# Altium PCB PCB_ECEN403.PcbDoc
Units mil, origin at the board's own origin, x right, y up, seen from the top; angles counter-clockwise.
Board outline 6000 x 4000 mil, 2 copper layers (Top Layer, Bottom Layer); 15 components, 14 nets, 113 pads, 17 vias.
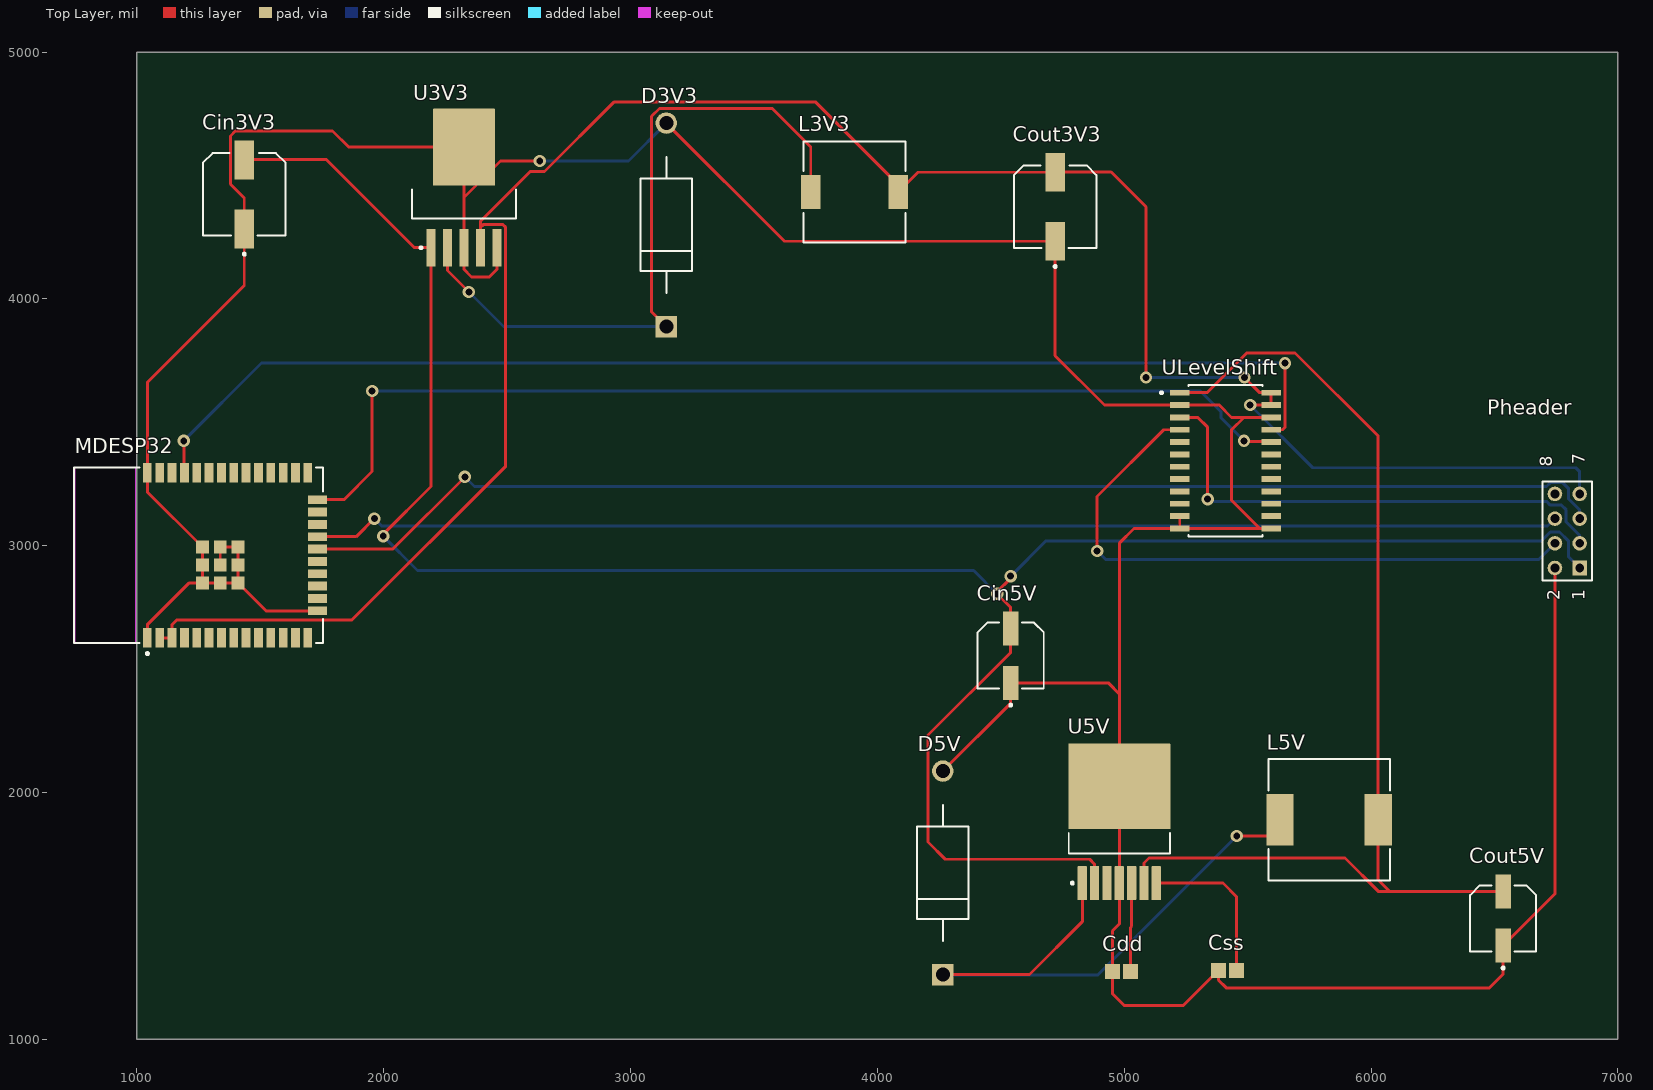
[diagram p0: Top Layer view]
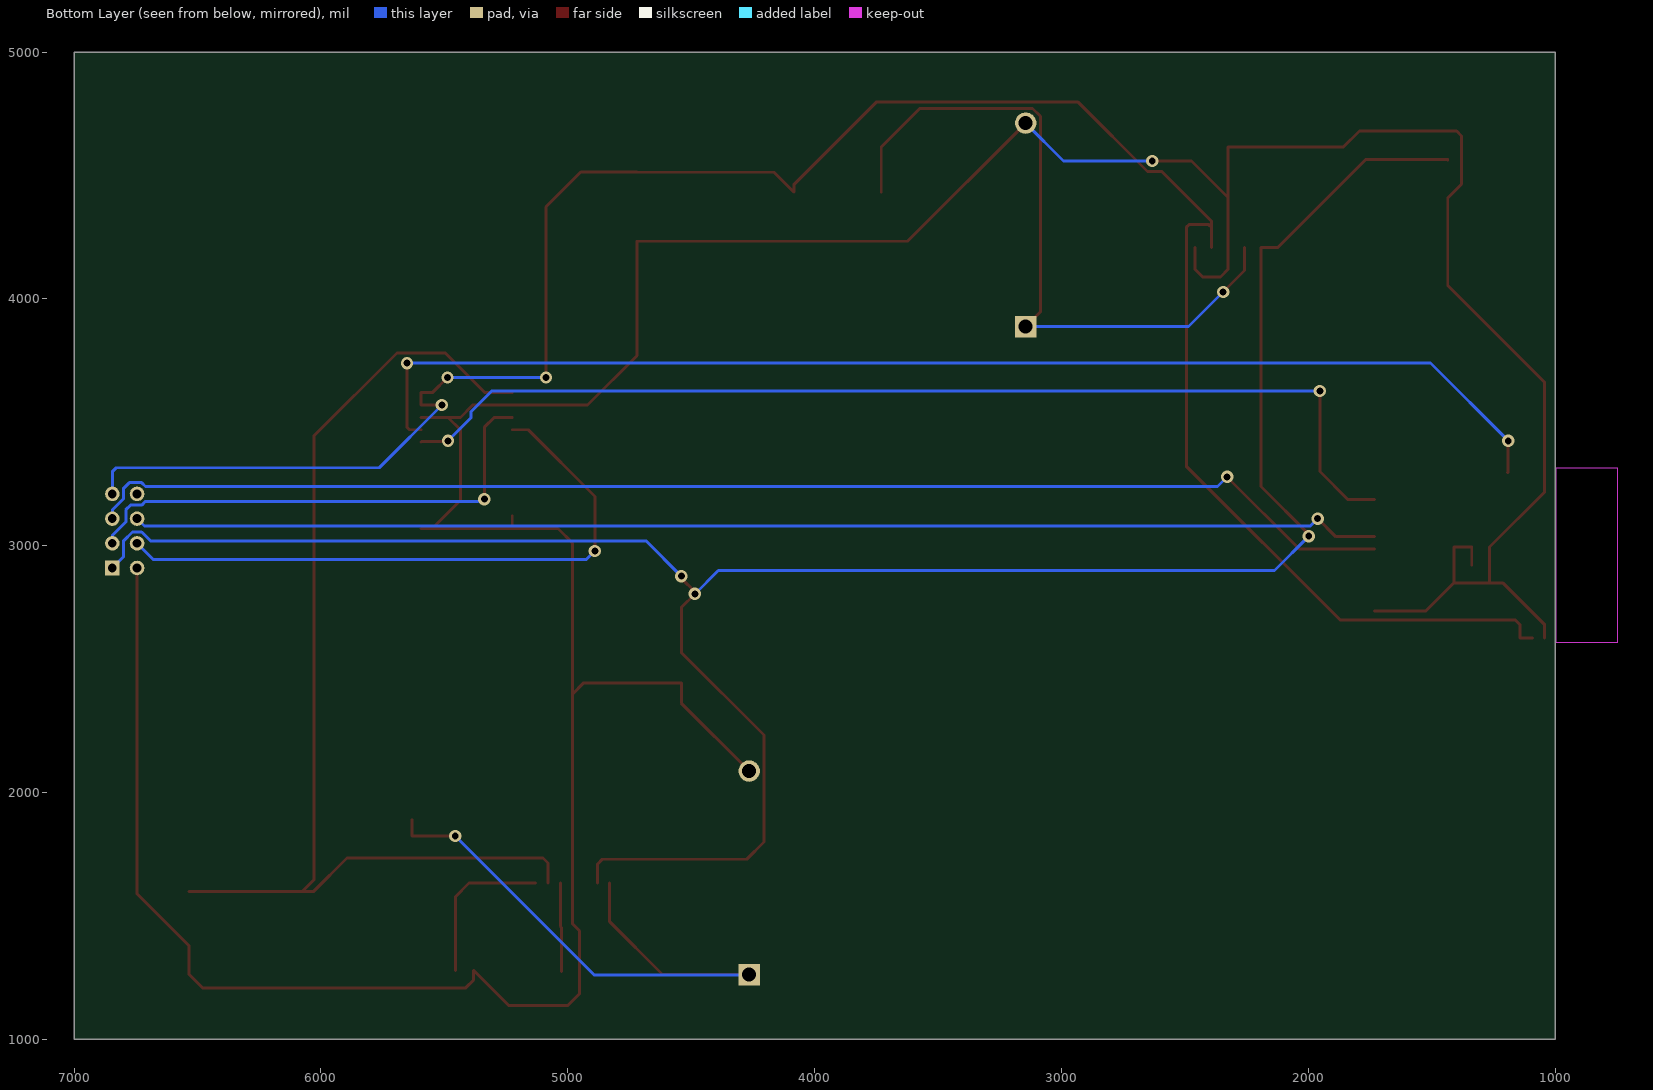
[diagram p1: Bottom Layer view, seen from below]
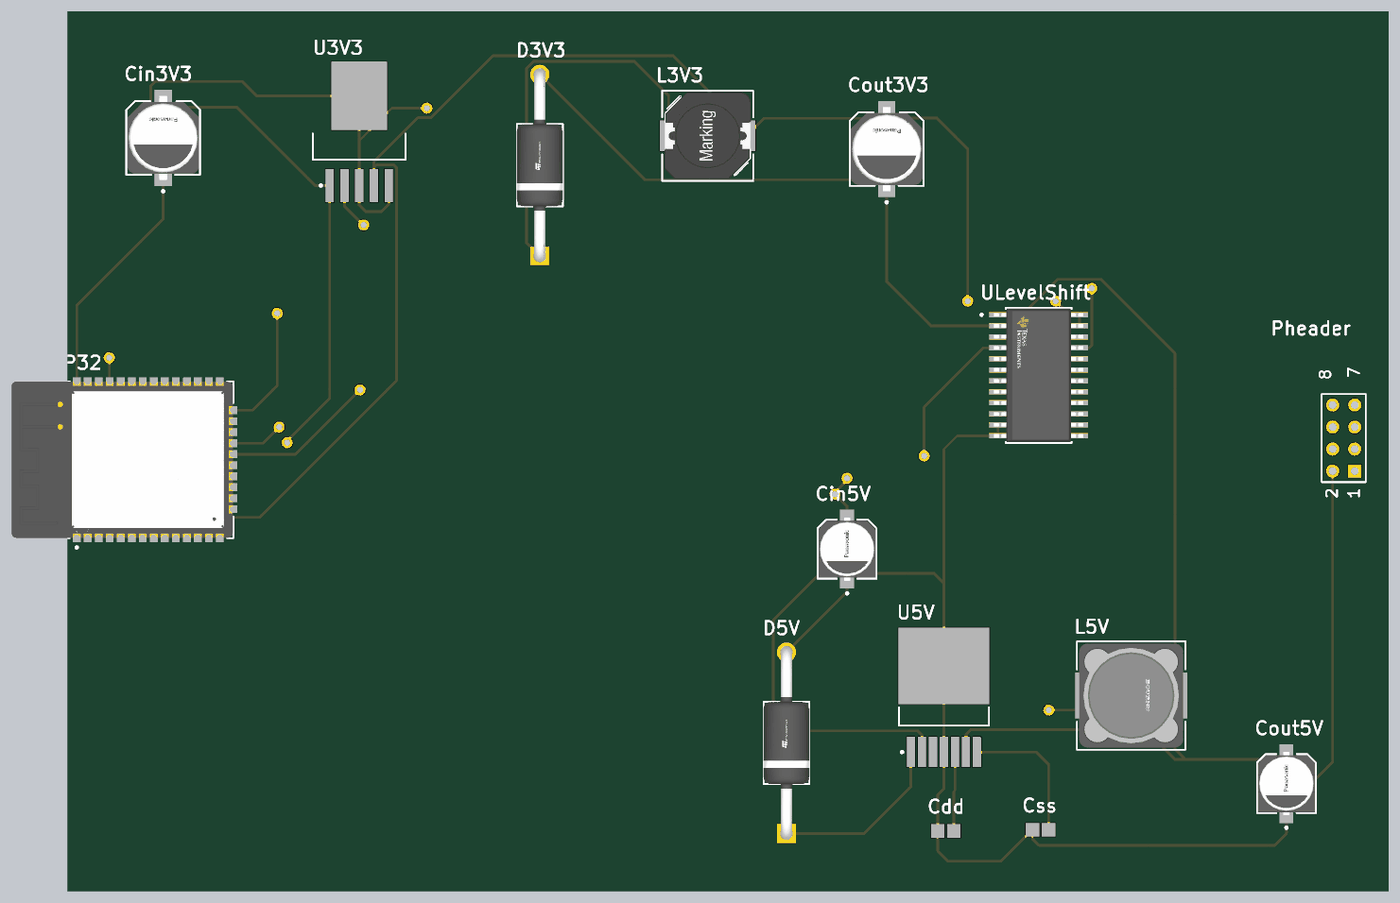
[diagram p2: 3D render of the assembled board from above, using the file's embedded part models]

## Layer stack, top to bottom
Top Solder: solder mask 0.4, Solder Resist, Dk 3.5
Top Layer: signal copper 1.4
Dielectric 1: dielectric 12.6, FR-4, Dk 4.8
Bottom Layer: signal copper 1.4
Bottom Solder: solder mask 0.4, Solder Resist, Dk 3.5

## Board outline
1000,1000 7000,1000 7000,5000 1000,5000

## Design rules (kind name [scope] priority, off if disabled: settings)
Clearance [All] p1: gap=10 ignorepadtopadclearanceinfootprint=FALSE except(0: Arc-Hole Track-Hole SMDPad-Hole THPad-Hole Via-Hole Fill-Hole Poly-Hole Region-Hole Text-Hole)
DiffPairsRouting [All] p1: maxlimit=30 minlimit=15 mostfreqgap=20 toplayer_minwidth=15 toplayer_maxwidth=15 toplayer_prefwidth=15 bottomlayer_minwidth=15 bottomlayer_maxwidth=15 bottomlayer_prefwidth=15 maxuncoupledlength=500
PolygonConnect [All] p1: connectstyle=Relief reliefconductorwidth=10 reliefentries=4 polygonreliefangle="90 Angle" airgapwidth=10
RoomDefinition PCB_Roomba [InComponentClass('PCB_Roomba')] p1: confinementstyle=ConfineIn formatcopy=TRUE lockcomponents=FALSE outline 710,1015 7005,1015 7005,4968.39 710,4968.39
RoutingVias [All] p1: holewidth=28 width=50 viastyle="Through Hole" minholewidth=28 minwidth=50 maxholewidth=28 maxwidth=50
SolderMaskExpansion [All] p1: expansion=4 istentingtop=FALSE
Width [All] p1: maxlimit=15 minlimit=10 preferedwidth=12 minimp=50.000000 maximp=50.000000 favimp=50.000000
29 further rules are at their usual default settings.

## Components (designator, comment, footprint, x,y, rotation, side; value= is the part's Value field where it differs from the comment)
Cdd "08051C104JAT2A" CAPC2013X94X50ML20T25 4988.58,1275 r0 top
Cin3V3 "EEEFT1H221AP" FP-FTF-MFG 1435,4423.62 r90 top
Cin5V "20SVPF120M" FP-OS-CON-SMT-C6-MFG 4540,2555 r90 top
Cout3V3 "EEEFT1H221AP" FP-FTF-MFG 4720,4373.39 r90 top
Cout5V "20SVPF120M" FP-OS-CON-SMT-C6-MFG 6535,1490 r90 top
Css "08051C104JAT2A" CAPC2013X94X50ML20T25 5418.58,1280 r0 top
D3V3 "1N5822" FP-DO-201AD-MFG 3145,4300 r90 top
D5V "1N5822" FP-DO-201AD-MFG 4265,1675 r90 top
L3V3 "7447714221" "WE-PD 1050" 3907.17,4433.39 r0 top
L5V "SRR1210-680M" FP-SRR1210-MFG 5830,1890 r0 top value=68uH
MDESP32 "ESP32-WROOM-32" FP-ESP32-WROOM-32-MFG 1249.57,2961.61 r90 top
Pheader "Header 4X2" HDR2X4 6845,2910 r90 top
U3V3 "LM2575SX-3.3/NOPB" KTT0005B_L 2325,4451.61 r90 top
U5V "LM2598S-5.0/NOPB" KTW0007B_N 4980,1881.3 r90 top
ULevelShift "SN74LVC4245ADW" FP-DW0024A-MFG 5410,3345 r0 top

## Footprints (in the part's own frame and the unit in brackets; to place one, negate y for a bottom-side part, rotate by r counter-clockwise, add the part's x,y. Pads: shape width x height; smd on the part's side, far side on the other; paste and mask are expansions set on the pad)
CAPC2013X94X50ML20T25 [mm] "Chip Capacitor, 2-Leads, Body 2.01x1.25mm, IPC Low Density"
  rect 1.55x1.55 smd: 1(-0.925,0) 2(0.925,0)
  body extent -1.1,-0.72 1.11,0.72, height 0.94
FP-DO-201AD-MFG [mm]
  rect 2.2x2.2 hole 1.45 paste-1000 mask+0: 1(-10.47,0)
  round 2.2 hole 1.45 paste-1000 mask+0: 2(10.47,0)
  silkscreen extent -7,-2.65 7,2.65, body extent -11.67,-2.75 11.67,2.75, height 0.25
FP-DW0024A-MFG [mm]
  rect 2x0.6 smd paste-1000 mask+0: 1(-4.7,6.985) 2(-4.7,5.715) 3(-4.7,4.445) 4(-4.7,3.175) 5(-4.7,1.905) 6(-4.7,0.635) 7(-4.7,-0.635) 8(-4.7,-1.905) 9(-4.7,-3.175) 10(-4.7,-4.445) 11(-4.7,-5.715) 12(-4.7,-6.985) 13(4.7,-6.985) 14(4.7,-5.715) 15(4.7,-4.445) 16(4.7,-3.175) 17(4.7,-1.905) 18(4.7,-0.635) 19(4.7,0.635) 20(4.7,1.905) 21(4.7,3.175) 22(4.7,4.445) 23(4.7,5.715) 24(4.7,6.985)
  silkscreen extent -6.7,-7.8 3.8,7.8, body extent -5.8,-7.98 5.8,7.98, height 0.25
FP-ESP32-WROOM-32-MFG [mm]
  rect 2x0.9 smd paste+0 mask+0: 1(-8.5,5.26) 2(-8.5,3.99) 3(-8.5,2.72) 4(-8.5,1.45) 5(-8.5,0.18) 6(-8.5,-1.09) 7(-8.5,-2.36) 8(-8.5,-3.63) 9(-8.5,-4.9) 10(-8.5,-6.17) 11(-8.5,-7.44) 12(-8.5,-8.71) 13(-8.5,-9.98) 14(-8.5,-11.25) 25(8.5,-11.25) 26(8.5,-9.98) 27(8.5,-8.71) 28(8.5,-7.44) 29(8.5,-6.17) 30(8.5,-4.9) 31(8.5,-3.63) 32(8.5,-2.36) 33(8.5,-1.09) 34(8.5,0.18) 35(8.5,1.45) 36(8.5,2.72) 37(8.5,3.99) 38(8.5,5.26)
  rect 0.9x2 smd paste+0 mask+0: 15(-5.715,-12.25) 16(-4.445,-12.25) 17(-3.175,-12.25) 18(-1.905,-12.25) 19(-0.635,-12.25) 20(0.635,-12.25) 21(1.905,-12.25) 22(3.175,-12.25) 23(4.445,-12.25) 24(5.715,-12.25)
  rect 1.33x1.33 smd paste+0 mask+0: 39(-2.835,-2.24) 39(-2.835,-0.405) 39(-2.835,-4.075) 39(-1,-0.405) 39(-1,-4.075) 39(-1,-2.24) 39(0.835,-0.405) 39(0.835,-4.075) 39(0.835,-2.24)
  Keep-Out Layer region: -9,6.449 9,6.449 9,12.75 -9,12.75
  Keep-Out Layer region: -9,6.449 9,6.449 9,12.75 -9,12.75
  silkscreen extent -10.25,-12.8 9.05,12.8, body extent -9.6,-13.35 9.6,12.9, height 0.25
FP-FTF-MFG [mm]
  rect 4x2 smd paste+0 mask+0: 1(-3.55,0) 2(3.55,0)
  silkscreen extent -6.27,-4.25 4.25,4.25, body extent -5.8,-4.5 5.8,4.5, height 0.25
FP-OS-CON-SMT-C6-MFG [mm]
  rect 3.5x1.6 smd paste+0 mask+0: 1(-2.8,0) 2(2.8,0)
  silkscreen extent -5.22,-3.4 3.4,3.4, body extent -4.8,-3.65 4.8,3.65, height 0.25
FP-SRR1210-MFG [mm]
  rect 2.8x5.3 smd paste+0 mask+0: 1(-5.05,0) 2(5.05,0)
  silkscreen extent -6.25,-6.25 6.25,6.25, body extent -6.55,-6.35 6.55,6.35, height 0.25
HDR2X4 [mm] "Connector; Header; 4x2 Position"
  rect 1.5x1.5 hole 0.9: 1(0,0)
  round 1.5 hole 0.9: 2(0,2.54) 3(2.54,0) 4(2.54,2.54) 5(5.08,0) 6(5.08,2.54) 7(7.62,0) 8(7.62,2.54)
  silkscreen extent -1.27,-1.27 8.89,3.81
KTT0005B_L [mm] "DPAK, 5-Leads, Body 10.65x9.65mm, Pitch 1.7mm, IPC High Density"
  rrect11% 3.85x0.95 smd: 1(-6.2,3.4) 2(-6.2,1.7) 3(-6.2,0) 4(-6.2,-1.7) 5(-6.2,-3.4)
  rrect2% 7.9x6.4 smd: 6(4.15,0)
  silkscreen extent -6.32,-5.35 -0.2,5.35, body extent -3.2,-5.32 6.45,5.33, height 4.83
KTW0007B_N [mm] "DPAK, 7-Leads, Body 9.4x10.4mm, Pitch 1.27mm, IPC Medium Density"
  rrect11% 3.5x0.95 smd: 1(-6.3,3.81) 2(-6.3,2.54) 3(-6.3,1.27) 4(-6.3,0) 5(-6.3,-1.27) 6(-6.3,-2.54) 7(-6.3,-3.81)
  rrect1% 8.8x10.5 smd: 8(3.65,0)
  silkscreen extent -6.42,-5.2 -1.15,5.2, body extent -3.25,-5.2 6.15,5.2, height 4.65
"WE-PD 1050" [mm] "SMD Inductor, 2-Leads, Body 10,0x10,0mm"
  rect 2x3.5 smd: 1(-4.5,0) 2(4.5,0)
  silkscreen extent -5.25,-5.2 5.25,5.2, body extent -5,-5 5,5, height 4.75

## Part data
Cdd Css: library part CMP-1036-04427-2, Manufacturer="AVX Interconnect / Elco", Part Number=08051C104JAT2A
Cin3V3 Cout3V3: library part CMP-05427-000092-1, "CAP ALUM 220UF 20% 50V SMD", Capacitance=220uF, Case/Package=Radial, Dielectric Material=Aluminium, ESR (Equivalent Series Resistance)=180mR, Leakage Current=110uA, Max Operating Temperature=105°C, Min Operating Temperature=-55°C, Package Quantity=500, Ripple Current=670mA, Tolerance=20%, Voltage=50V, Construction=Cylindrical, Contact Plating=Tin, Diameter=8mm, Height=10.2mm, Height - Seated (Max)=0.413inch, Lead Diameter=0.9mm, Lead Free="Lead Free", Lead Pitch=3.1mm, Length=10.2mm, Life (Hours)=2000Hour, Mount="Surface Mount", Number of Pins=2, Packaging="Tape and Reel", Radiation Hardening=No, REACH SVHC="No SVHC", Ripple Current (AC)=670mA, RoHS Compliant=Yes, Series=FT, Termination=SMD/SMT, Voltage Rating=50V, Voltage Rating (DC)=50V
Cin5V Cout5V: library part CMP-05428-001333-1, "Conductive Polymer Aluminum Solid Capacitors (OS-CON) 120uF ±20% 20V", Capacitance=120uF, Case/Package=Radial, ESR (Equivalent Series Resistance)=25mR, Leakage Current=480uA, Max Operating Temperature=105°C, Min Operating Temperature=-55°C, Package Quantity=1000, Ripple Current=3.2A, Tolerance=20%, Voltage=20V, Construction=Cylindrical, Diameter=6.3mm, Dissipation Factor=12%, Height=5.9mm, Height - Seated (Max)=0.236inch, Lead Free="Lead Free", Length=5.9mm, Life (Hours)=5000Hour, Material=Polymer, Mount="Surface Mount", Number of Pins=6, Packaging="Tape and Reel", Polarity=Polar, Radiation Hardening=No, REACH SVHC="No SVHC", Ripple Current (AC)=3.2A, RoHS Compliant=Yes, Series="OS-CON™, SVPF", Termination=SMD/SMT, Voltage Rating=20V, Voltage Rating (DC)=20V
D3V3 D5V: library part CMP-12187-000025-1, "DIODE SCHOTTKY 40V 3A DO201AD", Forward Current=3A, Manufacturer=STMicroelectronics, Max Junction Temp=+150°C, Max Repetitive Reverse Voltage=40V, Max Surge Forward Current=80A, Package=DO-201AD, Peak Reverse Current=2mA, Temperature="to +150°C", Automotive=No, Category=Diode, ComponentLink2Description=Datasheet, ComponentLink2URL=https://www.st.com/resource/en/datasheet/1n5822.pdf, Device Class L1="Discrete Semiconductors", Device Class L2=Diodes, Device Class L3="Schottky Diodes", Digikey Description="DIODE SCHOTTKY 40V 3A DO201AD", Height=5.3mm, Lead Free=Yes, Manufacturer Part Number=1N5822, Mouser Description="Schottky Diodes & Rectifiers Vr/40V Io/3A BULK", Octopart=https://octopart.com/1n5822-stmicroelectronics-323225, RoHS=TRUE, Temperature Range High=+150°C
L3V3: library part CMP-1396-00021-1, "SMD-Shielded Power Inductor WE-PD, L=220 µH", Inductance="220 ÂµH", Manufacturer="Wuerth Elektronik", ComponentLink1Description="Manufacturer URL", ComponentLink1URL=http://www.we-online.com, ComponentLink2Description=Datasheet, ComponentLink2URL=http://www.we-online.de/katalog/media/pdf/7447714221.pdf, PackageReference="WE-PD 1050", PartNumber=7447714221
L5V: library part CMP-07248-000002-1, "FIXED IND 68UH 3A 102 MOHM SMD", Inductance=68uH, Manufacturer=Bourns, Package=SRR1210, Rms Current=3A, Saturation Current=2.7A, Self Resonant Frequency=3.8MHz, Series Resistance=102mΩ, Temperature="-40°C to +125°C", Temperature Range High=+125°C, Temperature Range Low=-40°C, Test Frequency=2.52MHz, Tolerance=20%, Automotive=No, Category=Ind, ComponentLink2Description=Datasheet, ComponentLink2URL=https://www.bourns.com/docs/Product-Datasheets/SRR1210.pdf, Composition=Wirewound, Core Material=Ferrite, Device Class L1="Passive Components", Device Class L2=Inductors, Device Class L3="Fixed Inductors", Digikey Description="FIXED IND 68UH 3A 102 MOHM SMD", Height=10mm, Lead Free=Yes, Manufacturer Part Number=SRR1210-680M, Mouser Description="Fixed Inductors 68uH 20% SMD 1210", Octopart=https://octopart.com/srr1210-680m-bourns-10487145, Q Factor=12, RoHS=TRUE, Shielding=true
MDESP32: library part CMP-194065-000008-1, "RX TXRX MOD WIFI SURFACE MOUNT", Case/Package=SMD/SMT, Frequency=2.5GHz, Max Operating Temperature=85°C, Min Operating Temperature=-40°C, Operating Supply Voltage=3.6V, Package Quantity=550, Data Rate=150Mbps, Mount="Surface Mount", Packaging="Cut Tape", Sensitivity=-98dBm, Weight=0.088185oz
Pheader: "Header, 4-Pin, Dual row", LatestRevisionDate=17-Jul-2002, LatestRevisionNote="Re-released for DXP Platform.", Publisher="Altium Limited"
U3V3: library part CMP-0069-00081-3, "SIMPLE SWITCHER® 1A Step-Down Voltage Regulator, 5-pin TO-263, Pb-Free", Manufacturer="Texas Instruments", PackageTopMarking="NSUZXYTTE#*LM2575S*-3.3 P+", PowerWise=N, Code_JEDEC=MO-169-AB, ComponentLink1Description="Datasheet URL", ComponentLink1URL=http://www.ti.com/general/docs/lit/getliterature.tsp?genericPartNumber=LM2575-N&fileType=pdf, CompType=Switcher, PackageDescription="TO-263, Molded, .400 x .390 x .180in, 5 Lead, .067in Pitch, Surface Mount", PackageReference=KTT0005B, PinCount=5, RoHS=Y
U5V: library part CMP-0069-00280-3, "SIMPLE SWITCHER® Power Converter 150 KHz 1A Step-Down Voltage Regulator with Features, 7-pin TO-263, Pb-Free", Manufacturer="Texas Instruments", PackageTopMarking="NSUZXYTTE#*LM2598S*-5.0 P+", PowerWise=N, Code_JEDEC=MO-169-AC, ComponentLink1Description="Datasheet URL", ComponentLink1URL=http://www.ti.com/general/docs/lit/getliterature.tsp?genericPartNumber=LM2598&fileType=pdf, CompType=Switcher, PackageDescription="TO-263, Molded, .400 x .390 x .180in Body, 7 Lead, .050in Pitch, Surface Mount", PackageReference=KTW0007B, PinCount=7, RoHS=Y
ULevelShift: library part CMP-04899-000091-1, "IC TRNSLTR BIDIRECTIONAL 24SOIC", Case/Package=SOIC, High Level Output Current=-24mA, Low Level Output Current=24mA, Max Operating Temperature=85°C, Max Supply Current=80uA, Max Supply Voltage=5.5V, Min Operating Temperature=-40°C, Min Supply Voltage=4.5V, Operating Supply Voltage=5V, Package Quantity=25, Contact Plating=Gold, Direction=Bidirectional, Height=2.35mm, Lead Free="Lead Free", Length=15.4mm, Logic Function=Translator, Mount="Surface Mount", Number of Bits=8, Number of Channels=8, Number of Circuits=8, Number of Elements=1, Number of Outputs=8, Number of Pins=24, Output Type=Voltage, Packaging=Rail/Tube, Polarity=Non-Inverting, Propagation Delay=9.8ns, Quiescent Current=80uA, Radiation Hardening=No, REACH SVHC="No SVHC", RoHS Compliant=Yes, Series=74LVC, Technology=CMOS, Turn-On Delay Time=6.7ns, Weight=0.022025oz, Width=7.52mm

## Via types
v1: diameter 50, hole 28, Top Layer to Bottom Layer, 17 vias

## Nets (pads, with @x,y where several pads share a name; then routed paths per layer and width w, separated by ;. In a path a pad name is that pad's centre, name@x,y a point inside that pad or via, vN(x,y) a via of type N, cw(c..) or ccw(c..) an arc to the next point about the centre after c; other vN are vias at no path point)
GND: Cdd.1 Cin3V3.1 Cin5V.1 Cout3V3.1 Cout5V.1 Css.1 D3V3.2 D5V.2 MDESP32.1 MDESP32.15 MDESP32.38 MDESP32.39 Pheader.2 U3V3.3 U3V3.5 U3V3.6 U5V.4 U5V.8 ULevelShift.2 ULevelShift.11 ULevelShift.12 ULevelShift.13 ULevelShift.22 | length 16565.4
  Top Layer w12: MDESP32.1 1042.48,2680 1212.48,2850 MDESP32.39@1265.51,2850 ; MDESP32.39@1337.76,2922.24 1337.76,2994.49 1410,2994.49 1410,2922.24 MDESP32.39@1410,2850 ; MDESP32.15 1523.39,2736.61 MDESP32.39@1410,2850 ; U3V3.5 2458.86,4120 2427.86,4089 2356,4089 2325,4120 U3V3.3 2325,4411 ; v1(2632,4559) 2473,4559 2325,4411 ; D3V3.2 3623.58,4233.62 Cout3V3.1 4720,3770 4920,3570 ULevelShift.2 5385,3570 5435,3520 5485,3520 ; D5V.2 4540,2362.2 Cin5V.1 4935.24,2444.76 4980,2400 ; ULevelShift.11 ULevelShift.12 ; ULevelShift.13 5549,3070 ; ULevelShift.22 5485,3520 ; Pheader.2 6745,1589.76 Cout5V.1 6535,1264 6480,1209 5413.17,1209 5382.17,1240 Css.1 5239.17,1137 5000,1137 4952.17,1184.83 Cdd.1 4952.17,1440 4980,1467.83 U5V.4 U5V.8 4980,2400 ; MDESP32.39@1265.51,2850 1337.76,2850 MDESP32.39@1410,2850 ; MDESP32.39@1265.51,2850 1265.51,2922.24 1265.51,2994.49 1042.48,3217.52 MDESP32.38 1042.48,3661.48 1435,4054 Cin3V3.1 1435,4409 1379,4465 1379,4660 1399,4680 1793,4680 1858,4615 U3V3.6 2325,4411 ; 4980,2400 4980,3010 5040,3070 ULevelShift.12 ; ULevelShift.12 5549,3070 ; 5485,3520 5435,3470 5435,3184 5549,3070
  Bottom Layer w12: v1(2632,4559) 2991.8,4559 D3V3.2
NetCdd_2: Cdd.2 U5V.5 | length 360.3
  Top Layer w12: Cdd.2 5025,1454 5030,1459 U5V.5
NetCin3V3_2: Cin3V3.2 Cin5V.2 Pheader.1 U3V3.1 U5V.2 | length 9264.1
  Top Layer w12: Cin3V3.2 1435,4564 1768,4564 2124.48,4207.52 U3V3.1 2191.14,3240.14 1998,3047 v1(1998,3039) ; v1(4540,2877) 4540,2868.5 4485,2813.5 v1(4485,2805) 4540,2750 4540,2568 4205,2233 4205,1800 4275,1730 4860,1730 4880,1710 U5V.2
  Bottom Layer w12: v1(1998,3039) 2137,2900 4390,2900 v1(4485,2805) ; v1(4540,2877) 4683,3020 6690.61,3020 6726.14,3055.53 6763.86,3055.53 6799,3020.39 6799,2956 Pheader.1
NetCout3V3_2: Cout3V3.2 L3V3.2 MDESP32.2 MDESP32.3 Pheader.7 U3V3.4 ULevelShift.23 ULevelShift.24 | length 8958.7
  Top Layer w12: MDESP32.2 MDESP32.3 1142.48,2680 1162.48,2700 1872,2700 2494,3322 2494,4290 2483,4301 2402.93,4301 2391.93,4290 ; U3V3.4 2391.93,4290 ; v1(5088,3682) 5088,4373 4947,4514 4720,4514 Cout3V3.2 4164.09,4513.15 L3V3.2 4084.33,4463 3750.33,4797 2932.05,4797 2651.25,4516.19 2593.19,4516.19 2391.93,4314.93 2391.93,4290 ; v1(5487,3682) 5549,3620 ULevelShift.24 ULevelShift.23 v1(5510,3570)
  Bottom Layer w12: v1(5088,3682) v1(5487,3682) ; v1(5510,3570) 5764,3316 6829,3316 6845,3300 Pheader.7
NetCout5V_2: Cout5V.2 L5V.2 U5V.6 ULevelShift.1 | length 4474.5
  Top Layer w12: U5V.6 5080,1715 5100,1735 5894,1735 6029,1600 6074.82,1600 ; ULevelShift.1 5335,3620 5496,3781 5692,3781 6028.82,3444.18 L5V.2 6028.82,1646 6074.82,1600 ; Cout5V.2 6535,1600 6074.82,1600
NetCss_2: Css.2 U5V.7 | length 646
  Top Layer w12: U5V.7 5400,1633.27 5455,1578.27 Css.2
NetD3V3_1: D3V3.1 L3V3.1 U3V3.2 | length 2856.1
  Top Layer w12: U3V3.2 2258.07,4114.93 v1(2345,4028) ; D3V3.1 3085,3947.8 3085,4740 3117,4772 3574,4772 3730,4616 L3V3.1
  Bottom Layer w12: v1(2345,4028) 2485.2,3887.8 D3V3.1
NetD5V_1: D5V.1 L5V.1 U5V.1 | length 2475.8
  Top Layer w12: D5V.1 4615.8,1262.8 4830,1477 U5V.1 ; v1(5456,1824) 5631.18,1824 L5V.1
  Bottom Layer w12: D5V.1 4265,1262 4894,1262 v1(5456,1824)
NetMDESP32_20: MDESP32.20 Pheader.5 | length 5362.2
  Top Layer w12: MDESP32.20 2036.57,2986.61 v1(2328.96,3279)
  Bottom Layer w12: v1(2328.96,3279) 2367.96,3240 6710.61,3240 6726.14,3255.53 6776.44,3255.53 6799,3232.97 6799,3191.06 6845,3145.06 Pheader.5
NetMDESP32_21: MDESP32.21 Pheader.6 | length 5068.4
  Top Layer w12: MDESP32.21 1888.61,3036.61 v1(1962,3110)
  Bottom Layer w12: v1(1962,3110) 1992,3080 6715,3080 Pheader.6
NetMDESP32_24: MDESP32.24 ULevelShift.20 | length 4337.2
  Top Layer w12: MDESP32.24 1839,3186.61 1953,3300.61 v1(1953,3627) ; v1(5485,3425) 5487.5,3422.5 5592.54,3422.5 ULevelShift.20
  Bottom Layer w12: v1(1953,3627) 5308,3627 5392.86,3542.14 5392.86,3517.14 v1(5485,3425)
NetMDESP32_35: MDESP32.35 ULevelShift.21 | length 5041.3
  Top Layer w12: v1(1190,3425) 1191.24,3423.76 1191.24,3297.5 MDESP32.35 ; ULevelShift.21 5641,3470 5651,3480 v1(5651,3740)
  Bottom Layer w12: v1(1190,3425) 1505,3740 v1(5651,3740)
NetPheader_3: Pheader.3 ULevelShift.3 | length 2049.2
  Top Layer w12: ULevelShift.3 5298,3520 5338,3480 v1(5338,3189)
  Bottom Layer w12: v1(5338,3189) 5345.27,3181.73 5362.3,3181.73 5364.03,3180 6710.61,3180 6726.14,3164.47 6771.53,3164.47 6790.53,3145.47 6790.53,3096.47 6845,3042 Pheader.3
NetPheader_4: Pheader.4 ULevelShift.4 | length 2563.8
  Top Layer w12: v1(4890,2979) 4890,3200 5160,3470 ULevelShift.4
  Bottom Layer w12: v1(4890,2979) 4924,2945 6680,2945 Pheader.4
pads on no net: MDESP32.4 MDESP32.5 MDESP32.6 MDESP32.7 MDESP32.8 MDESP32.9 MDESP32.10 MDESP32.11 MDESP32.12 MDESP32.13 MDESP32.14 MDESP32.16 MDESP32.17 MDESP32.18 MDESP32.19 MDESP32.22 MDESP32.23 MDESP32.25 MDESP32.26 MDESP32.27 MDESP32.28 MDESP32.29 MDESP32.30 MDESP32.31 MDESP32.32 MDESP32.33 MDESP32.34 MDESP32.36 MDESP32.37 Pheader.8 U5V.3 ULevelShift.5 ULevelShift.6 ULevelShift.7 ULevelShift.8 ULevelShift.9 ULevelShift.10 ULevelShift.14 ULevelShift.15 ULevelShift.16 ULevelShift.17 ULevelShift.18 ULevelShift.19

## Text inside footprints (layer, text, board x,y; h text height)
Pheader: Top Overlay "8" at 6735,3320 h50 r90; Top Overlay "7" at 6865,3330 h50 r90; Top Overlay "1" at 6865,2780 h50 r90; Top Overlay "2" at 6765,2780 h50 r90